# EAGLE board 8MEM (EAGLE 9.4.2)
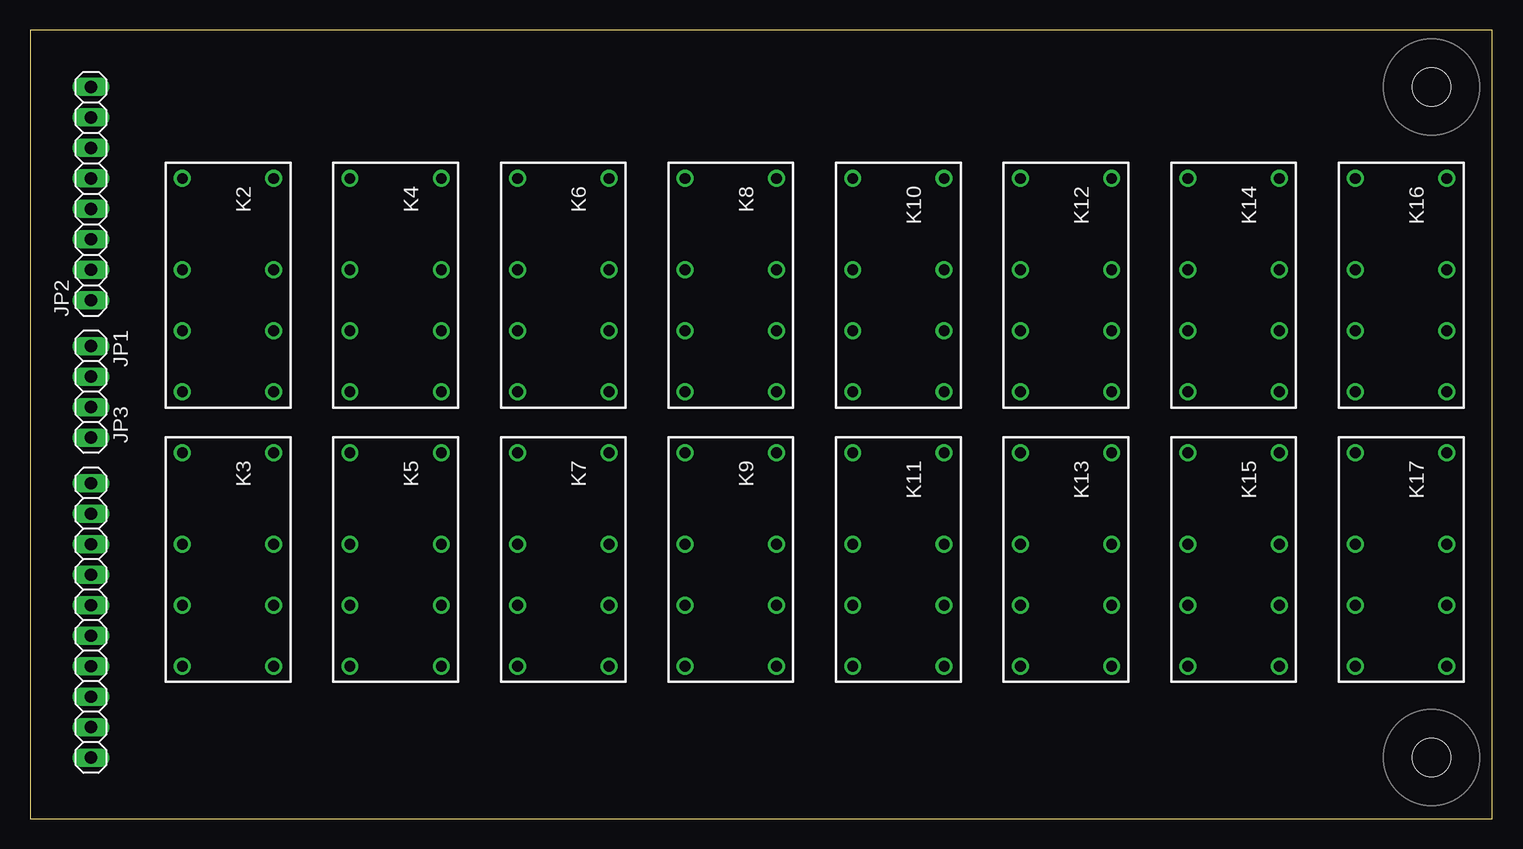
[diagram p0: board, top side]
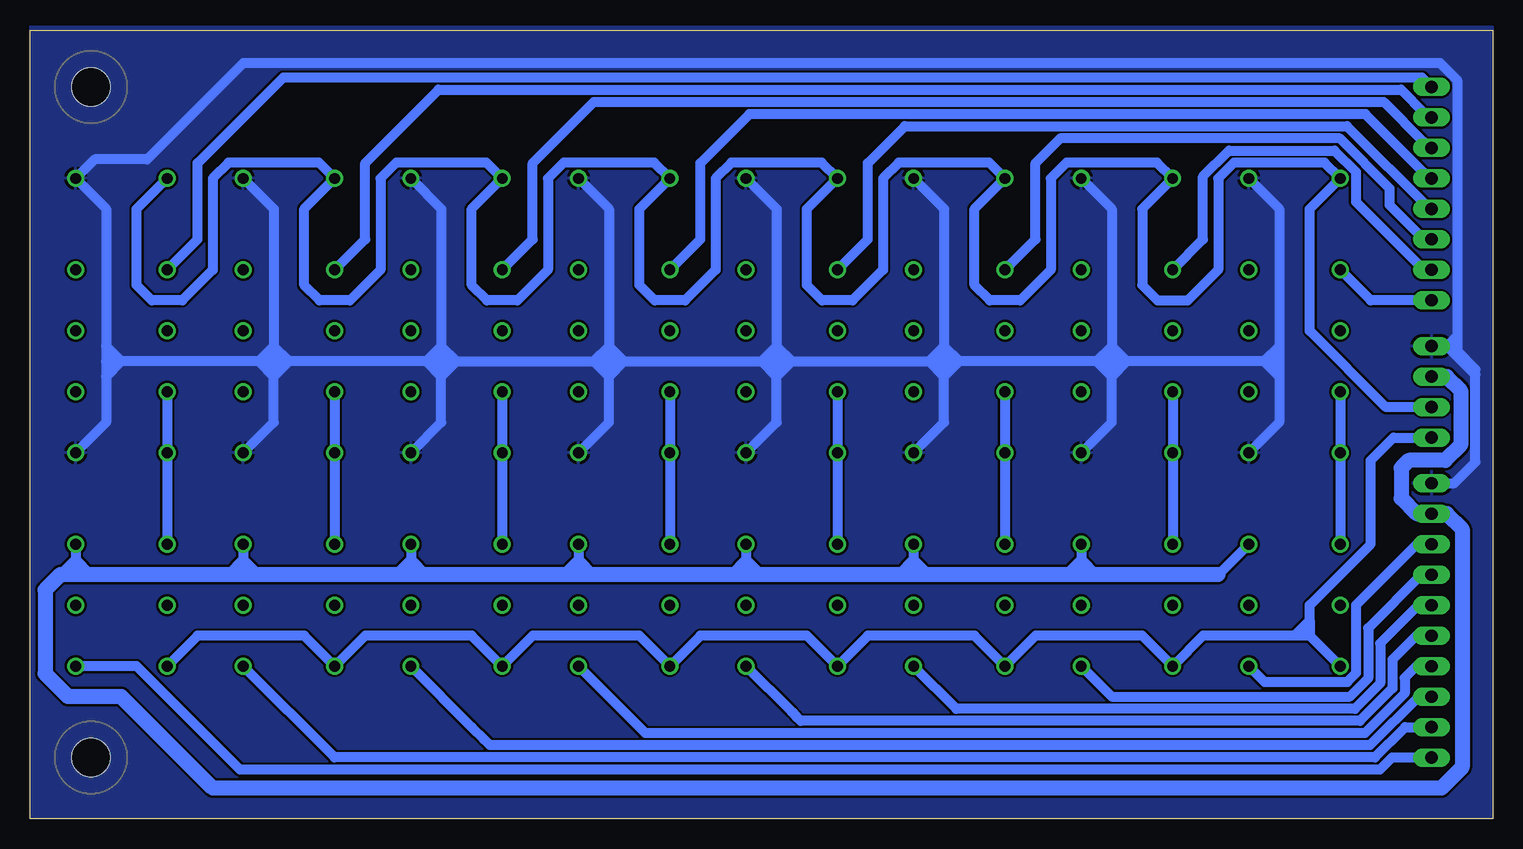
[diagram p1: board, bottom side, seen from below]

Size 121.9 x 65.71 mm. Coordinates in mm from the lower left corner, seen from the top.
Outline: 0,0 121.9,0 121.9,65.71 0,65.71 0,0
Copper layers (1*16): Top 0.0356mm / dielectric 1.5011mm / Bottom 0.0356mm
Design rules "formitaminimum": minimum track width 5mil, minimum drill 0.5994mm, track to track 0.2007mm, track to pad 0.2007mm, pad to pad 0.2007mm, via to via 0.2007mm, smd to smd 0mil, copper to edge 0mil, drill to drill 1mil, minimum pad ring 10mil, minimum via ring 8mil, stop-mask expansion 4mil, vias tented up to drill 1mm, thermal gap 10mil

## Footprints (pad centres in the part's own frame; a part is rotated, then mirrored left to right if it is on the bottom)
1X04 = drill 1.016 long: 1 -3.81,0; 2 -1.27,0; 3 1.27,0; 4 3.81,0
1X08 = drill 1.016 long: 1 -8.89,0; 2 -6.35,0; 3 -3.81,0; 4 -1.27,0; 5 1.27,0; 6 3.81,0; 7 6.35,0; 8 8.89,0
1X10 = drill 1.016 long: 1 -11.43,0; 2 -8.89,0; 3 -6.35,0; 4 -3.81,0; 5 -1.27,0; 6 1.27,0; 7 3.81,0; 8 6.35,0; 9 8.89,0; 10 11.43,0
DS-BT = drill 0.9: 1 -8.89,-3.81; 4 -1.27,-3.81; 6 3.81,-3.81; 8 8.89,-3.81; 9 8.89,3.81; 11 3.81,3.81; 13 -1.27,3.81; 16 -8.89,3.81
HOLE_3.2 = hole 3.2: 0,0

## Placement (x,y rotation side)
JP1  [1X04]  5.08,35.56 270 top
JP2  [1X08]  5.08,52.07 90 top
JP3  [1X10]  5.08,16.51 270 top
K2  RELAY5V  [DS-BT]  16.51,44.45 270 top
K3  RELAY5V  [DS-BT]  16.51,21.59 270 top
K4  RELAY5V  [DS-BT]  30.48,44.45 270 top
K5  RELAY5V  [DS-BT]  30.48,21.59 270 top
K6  RELAY5V  [DS-BT]  44.45,44.45 270 top
K7  RELAY5V  [DS-BT]  44.45,21.59 270 top
K8  RELAY5V  [DS-BT]  58.42,44.45 270 top
K9  RELAY5V  [DS-BT]  58.42,21.59 270 top
K10  RELAY5V  [DS-BT]  72.39,44.45 270 top
K11  RELAY5V  [DS-BT]  72.39,21.59 270 top
K12  RELAY5V  [DS-BT]  86.36,44.45 270 top
K13  RELAY5V  [DS-BT]  86.36,21.59 270 top
K14  RELAY5V  [DS-BT]  100.33,44.45 270 top
K15  RELAY5V  [DS-BT]  100.33,21.59 270 top
K16  RELAY5V  [DS-BT]  114.3,44.45 270 top
K17  RELAY5V  [DS-BT]  114.3,21.59 270 top
U$1  [HOLE_3.2]  116.84,60.96 0 top
U$2  [HOLE_3.2]  116.84,5.08 0 top

## Library data of the parts
JP1-JP3 = pinhead
K2-K17 = My
U$1 U$2 = Document_Robotech

## Nets
+5V: JP1.2 JP3.2 K3.13 K5.13 K7.13 K9.13 K11.13 K13.13 K15.13 K17.13
B1: JP2.1 K2.4
B2: JP2.2 K4.4
B3: JP2.3 K6.4
B4: JP2.4 K8.4
B5: JP2.5 K10.4
B6: JP2.6 K12.4
B7: JP2.7 K14.4
B8: JP2.8 K16.4
ENABLE: JP1.3 K2.1 K4.1 K6.1 K8.1 K10.1 K12.1 K14.1 K16.1
GND: JP1.1 JP3.1 K2.16 K3.16 K4.16 K5.16 K6.16 K7.16 K8.16 K9.16 K10.16 K11.16 K12.16 K13.16 K14.16 K15.16 K16.16 K17.16
N$3: K2.8 K3.1 K3.4
N$5: JP3.3 K3.9
N$6: K4.8 K5.1 K5.4
N$8: K6.8 K7.1 K7.4
N$10: K8.8 K9.1 K9.4
N$11: JP3.4 K5.9
N$13: K10.8 K11.1 K11.4
N$14: JP3.5 K7.9
N$16: K12.8 K13.1 K13.4
N$17: JP3.6 K9.9
N$19: K14.8 K15.1 K15.4
N$20: JP3.7 K11.9
N$22: K16.8 K17.1 K17.4
N$23: JP3.8 K13.9
N$24: JP3.9 K15.9
N$25: JP3.10 K17.9
STORE: JP1.4 K3.8 K5.8 K7.8 K9.8 K11.8 K13.8 K15.8 K17.8

## Tracks (layer width: path | path; a pad name or v marks a point on that pad's centre or on a via)
+5V
  Bottom 0.813: K3.13 22.86,20.32 | K5.13 34.29,21.59 | 34.29,21.59 34.29,20.32 | 34.29,21.59 33.02,20.32 | 34.29,21.59 35.56,20.32 | K7.13 48.26,21.59 | 48.26,21.59 48.26,20.32 | 48.26,21.59 46.99,20.32 | 48.26,21.59 49.53,20.32 | K9.13 62.23,21.59 | 62.23,20.32 62.23,21.59 | 62.23,21.59 60.96,20.32 | 62.23,21.59 63.5,20.32 | K11.13 76.2,21.59 | 76.2,20.32 76.2,21.59 | 76.2,21.59 74.93,20.32 | 76.2,21.59 77.47,20.32 | K13.13 90.17,21.59 | 90.17,21.59 90.17,20.32 | 90.17,21.59 88.9,20.32 | 90.17,21.59 91.44,20.32 | K15.13 104.14,21.59 | 104.14,20.32 104.14,21.59 | 104.14,21.59 102.87,20.32 | 104.14,21.59 105.41,20.32 | K17.13 118.11,21.59 | 118.11,21.59 118.11,20.32 | 116.84,20.32 118.11,21.59 | 118.11,21.59 119.38,20.32
  Bottom 1.27: 22.86,20.32 33.02,20.32 34.29,20.32 35.56,20.32 46.99,20.32 48.26,20.32 49.53,20.32 60.96,20.32 62.23,20.32 63.5,20.32 74.93,20.32 76.2,20.32 77.47,20.32 88.9,20.32 90.17,20.32 91.44,20.32 102.87,20.32 104.14,20.32 105.41,20.32 116.84,20.32 118.11,20.32 119.38,20.32 120.65,19.05 120.65,12.06 118.75,10.16 114.3,10.16 106.68,2.54 4.27,2.54 2.54,4.27 2.54,24.13 3.81,25.4 JP3.2 6.35,25.4 7.62,26.67 7.62,29.21 6.99,29.84 3.93,29.84 2.66,31.11 2.66,35.68 3.81,36.83 JP1.2
B1
  Bottom 0.813: JP2.1 10.16,43.18 K2.4
B2
  Bottom 0.813: K4.4 24.13,48.26 24.13,53.5 21.97,55.66 13.17,55.66 11.39,53.88 11.39,51.39 5.71,45.72 JP2.2
B3
  Bottom 0.813: K6.4 38.1,48.26 38.1,54.61 36.03,56.68 12.75,56.68 8.57,52.5 8.57,51.12 5.71,48.26 JP2.3
B4
  Bottom 0.813: K8.4 52.07,48.26 52.07,54.61 48.99,57.69 12.13,57.69 5.24,50.8 JP2.4
B5
  Bottom 0.813: K10.4 66.04,48.26 66.04,54.61 61.95,58.7 10.6,58.7 5.71,53.82 5.71,53.34 JP2.5
B6
  Bottom 0.813: K12.4 80.01,48.26 80.01,54.61 74.9,59.72 9.08,59.72 5.71,56.36 5.71,55.88 JP2.6
B7
  Bottom 0.813: K14.4 93.98,48.26 93.98,54.61 87.86,60.73 7.62,60.73 5.71,58.83 5.71,58.42 JP2.7
B8
  Bottom 0.813: K16.4 107.95,48.26 107.95,54.61 100.81,61.75 5.87,61.75 JP2.8
ENABLE
  Bottom 0.813: K16.1 113.03,50.8 113.03,44.45 111.76,43.18 109.22,43.18 106.68,45.72 106.68,53.34 105.37,54.65 97.83,54.65 K14.1 99.06,50.8 99.06,44.45 97.79,43.18 95.25,43.18 92.71,45.72 92.71,53.34 91.4,54.65 83.86,54.65 K12.1 85.09,50.8 85.09,44.45 83.82,43.18 81.28,43.18 78.74,45.72 78.74,53.34 77.43,54.65 69.89,54.65 K10.1 71.12,50.8 71.12,44.45 69.85,43.18 67.31,43.18 64.77,45.72 64.77,53.34 63.46,54.65 55.92,54.65 K8.1 57.15,50.8 57.15,44.45 55.88,43.18 53.34,43.18 50.8,45.72 50.8,53.34 49.49,54.65 41.95,54.65 K6.1 43.18,50.8 43.18,44.45 41.91,43.18 39.37,43.18 36.83,45.72 36.83,53.34 35.52,54.65 27.98,54.65 K4.1 29.21,50.8 29.21,44.45 27.94,43.18 25.4,43.18 22.86,45.72 22.86,53.34 21.55,54.65 14.01,54.65 K2.1 15.24,50.8 15.24,40.64 8.89,34.29 JP1.3
GND
  Bottom 0.813: K2.16 17.78,50.8 17.78,39.37 | 17.78,39.37 17.78,38.1 | 17.78,38.1 17.78,36.83 | 17.78,36.83 17.78,33.02 K3.16 | K4.16 31.75,50.8 31.75,39.37 | 31.75,39.37 31.75,38.1 | 31.75,38.1 31.75,36.83 | 31.75,36.83 31.75,33.02 K5.16 | K6.16 45.72,50.8 45.72,39.37 | 45.72,39.37 45.72,38.1 | 45.72,36.83 45.72,33.02 K7.16 | 45.72,38.1 45.72,36.83 | K8.16 59.69,50.8 59.69,39.37 | 59.69,39.37 59.69,38.1 | 59.69,36.83 59.69,33.02 K9.16 | 59.69,38.1 59.69,36.83 | K10.16 73.66,50.8 73.66,39.37 | 73.66,38.1 73.66,39.37 | 73.66,36.83 73.66,33.02 K11.16 | 73.66,38.1 73.66,36.83 | K12.16 87.63,50.8 87.63,39.37 | 87.63,39.37 87.63,38.1 | 87.63,36.83 87.63,33.02 K13.16 | 87.63,38.1 87.63,36.83 | 101.6,39.37 101.6,50.8 K14.16 | 101.6,39.37 101.6,38.1 | 101.6,36.83 101.6,33.02 K15.16 | 101.6,38.1 101.6,36.83 | 115.57,39.37 115.57,50.8 K16.16 116.52,54.93 112.16,54.93 104.14,62.94 4.37,62.94 2.95,61.53 2.95,40.23 | 115.57,39.37 115.57,38.1 | 115.57,38.1 115.57,36.83 | 115.57,36.83 115.57,33.02 K17.16 | 17.78,38.1 19.05,38.1 | 31.75,38.1 30.48,38.1 | 19.05,38.1 30.48,38.1 | 31.75,38.1 33.02,38.1 | 33.02,38.1 44.45,38.1 | 44.45,38.1 45.72,38.1 | 45.72,38.1 46.99,38.1 | 59.69,38.1 58.42,38.1 | 58.42,38.1 46.99,38.1 | 59.69,38.1 60.96,38.1 | 73.66,38.1 72.39,38.1 | 72.39,38.1 60.96,38.1 | 73.66,38.1 74.93,38.1 | 87.63,38.1 86.36,38.1 | 86.36,38.1 74.93,38.1 | 87.63,38.1 88.9,38.1 | 88.9,38.1 100.33,38.1 | 100.33,38.1 101.6,38.1 | 101.6,38.1 102.87,38.1 | 102.87,38.1 114.3,38.1 | 114.3,38.1 115.57,38.1 | 17.78,39.37 19.05,38.1 | 19.05,38.1 17.78,36.83 | 30.48,38.1 31.75,39.37 | 30.48,38.1 31.75,36.83 | 31.75,36.83 33.02,38.1 | 33.02,38.1 31.75,39.37 | 44.45,38.1 45.72,39.37 | 45.72,39.37 46.99,38.1
  Bottom 0.813: 46.99,38.1 45.72,36.83 | 45.72,36.83 44.45,38.1 | 58.42,38.1 59.69,39.37 | 59.69,39.37 60.96,38.1 | 60.96,38.1 59.69,36.83 | 59.69,36.83 58.42,38.1 | 72.39,38.1 73.66,39.37 | 73.66,39.37 74.93,38.1 | 74.93,38.1 73.66,36.83 | 73.66,36.83 72.39,38.1 | 86.36,38.1 87.63,39.37 | 87.63,39.37 88.9,38.1 | 88.9,38.1 87.63,36.83 | 87.63,36.83 86.36,38.1 | 101.6,39.37 102.87,38.1 | 102.87,38.1 101.6,36.83 | 101.6,36.83 100.33,38.1 | 100.33,38.1 101.6,39.37 | 115.57,39.37 114.3,38.1 | 114.3,38.1 115.57,36.83 | JP3.1 3.17,27.94 1.42,29.69 1.42,36.98 | 3.81,39.37 2.95,40.23 | 3.81,39.37 3.17,38.73 | 3.81,39.37 JP1.1 | 2.95,40.23 2.95,38.96 | 2.95,38.96 3.17,38.73 | 1.42,36.98 3.17,38.73 | 1.42,36.98 1.42,37.44 2.95,38.96
  pour Bottom: 0,66.04 0,0 121.92,0 121.92,66.04
N$3
  Bottom 0.813: K2.8 K3.1 K3.4
N$5
  Bottom 0.813: K3.9 19.01,11.39 12.11,11.39 11.39,12.11 11.39,17.78 6.31,22.86 JP3.3
N$6
  Bottom 0.813: K4.8 K5.1 K5.4
N$8
  Bottom 0.813: K6.8 K7.1 K7.4
N$10
  Bottom 0.813: K8.8 K9.1 K9.4
N$11
  Bottom 0.813: K5.9 31.75,10.16 11.9,10.16 10.38,11.69 10.38,15.88 5.93,20.32 JP3.4
N$13
  Bottom 0.813: K10.8 K11.1 K11.4
N$14
  Bottom 0.813: K7.9 44.71,9.15 11.48,9.15 9.36,11.27 9.36,14.61 6.19,17.78 JP3.5
N$16
  Bottom 0.813: K12.8 K13.1 K13.4
N$17
  Bottom 0.813: K9.9 58.42,8.89 58.06,8.53 57.66,8.13 11.06,8.13 8.35,10.85 8.35,13.24 6.35,15.24 JP3.6
N$19
  Bottom 0.813: K14.8 K15.1 K15.4
N$20
  Bottom 0.813: K11.9 71.75,8.26 71.07,7.57 70.62,7.12 10.64,7.12 7.33,10.43 7.33,11.71 6.35,12.7 JP3.7
N$22
  Bottom 0.813: K16.8 K17.1 K17.4
N$23
  Bottom 0.813: K13.9 85.09,7.62 84.07,6.6 83.58,6.11 10.22,6.11 6.17,10.16 JP3.8
N$24
  Bottom 0.813: K15.9 96.53,5.09 9.8,5.09 7.28,7.62 JP3.9
N$25
  Bottom 0.813: K17.9 113.03,12.7 105.41,5.08 105,4.67 104.41,4.08 9.38,4.08 8.38,5.08 JP3.10
STORE
  Bottom 0.813: K3.8 15.24,15.24 | 15.24,15.24 16.51,15.24 | 16.51,15.24 24.13,15.24 K5.8 29.21,15.24 38.1,15.24 K7.8 43.18,15.24 52.07,15.24 K9.8 57.15,15.24 66.04,15.24 K11.8 71.12,15.24 80.01,15.24 K13.8 85.09,15.24 93.98,15.24 K15.8 99.06,15.24 107.95,15.24 K17.8 | 15.24,16.51 15.24,17.78 10.16,22.86 10.16,29.84 8.26,31.75 JP1.4 | 15.24,16.51 15.24,15.24 | 16.51,15.24 15.24,16.51